# Altium PCB Active Sensor BB.PcbDoc
Units mil, origin at the board's own origin, x right, y up, seen from the top; angles counter-clockwise.
Board outline 3681 x 2951 mil, 4 copper layers (Top Layer, GND Plane, Signal Layer 1, Bottom Layer), stack 61.634 mil thick; 107 components, 97 nets, 358 pads, 97 vias.
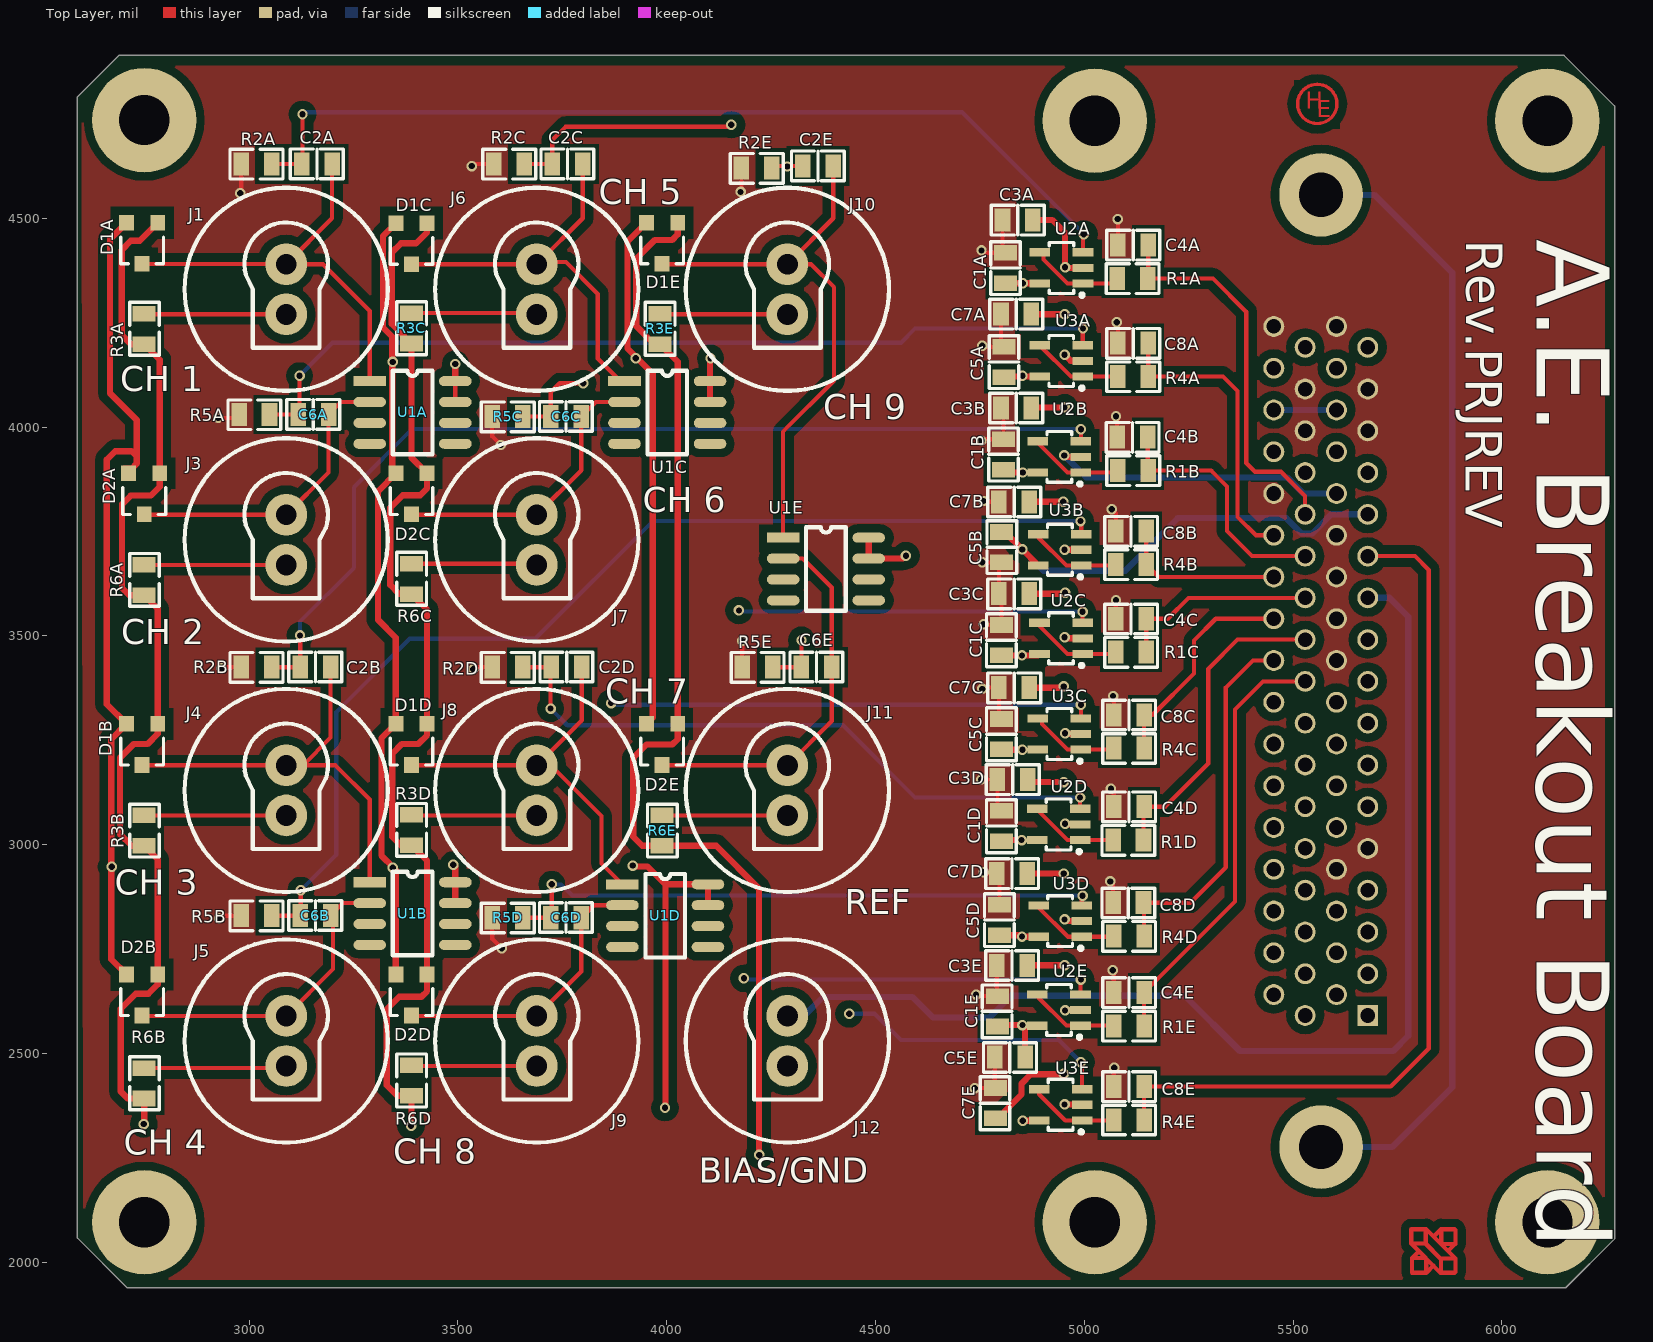
[diagram p0: Top Layer view]
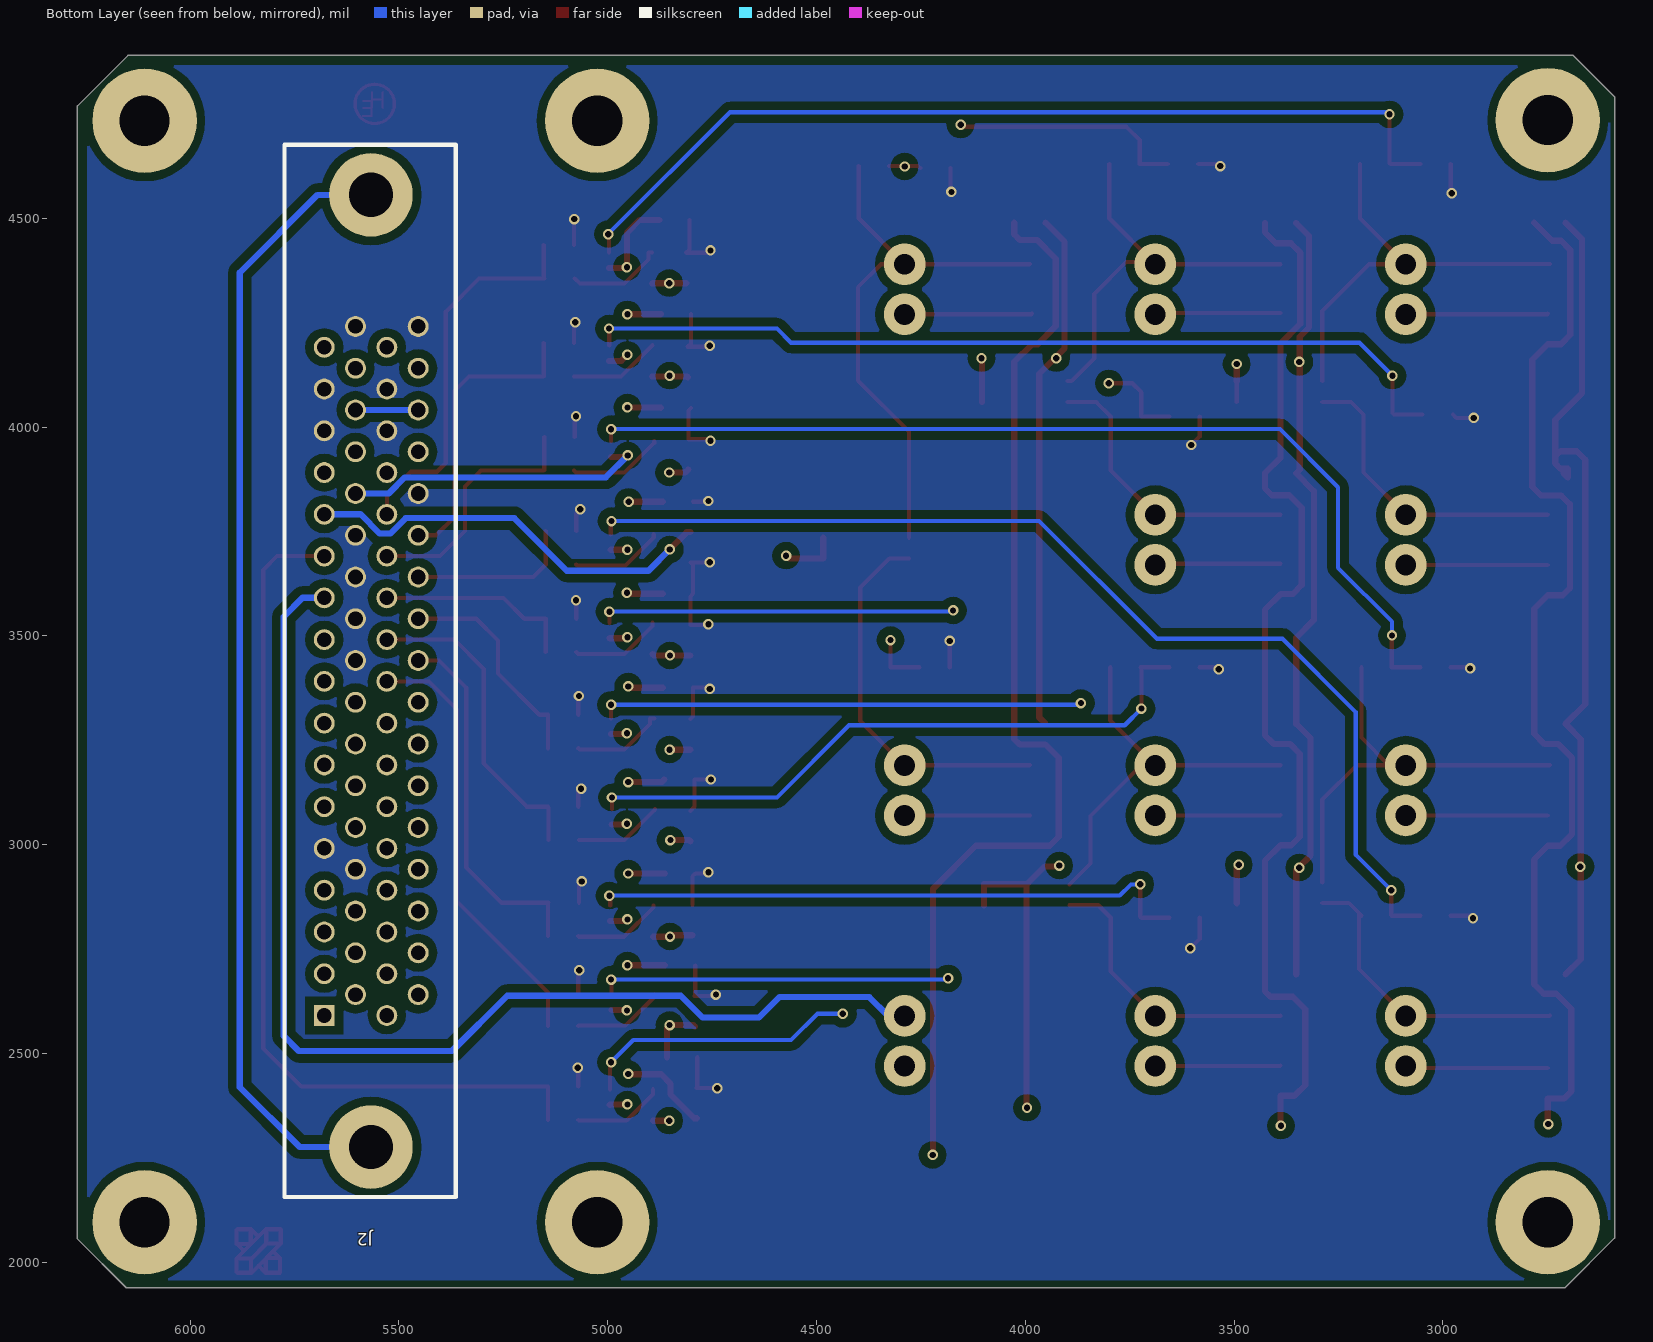
[diagram p1: Bottom Layer view, seen from below]
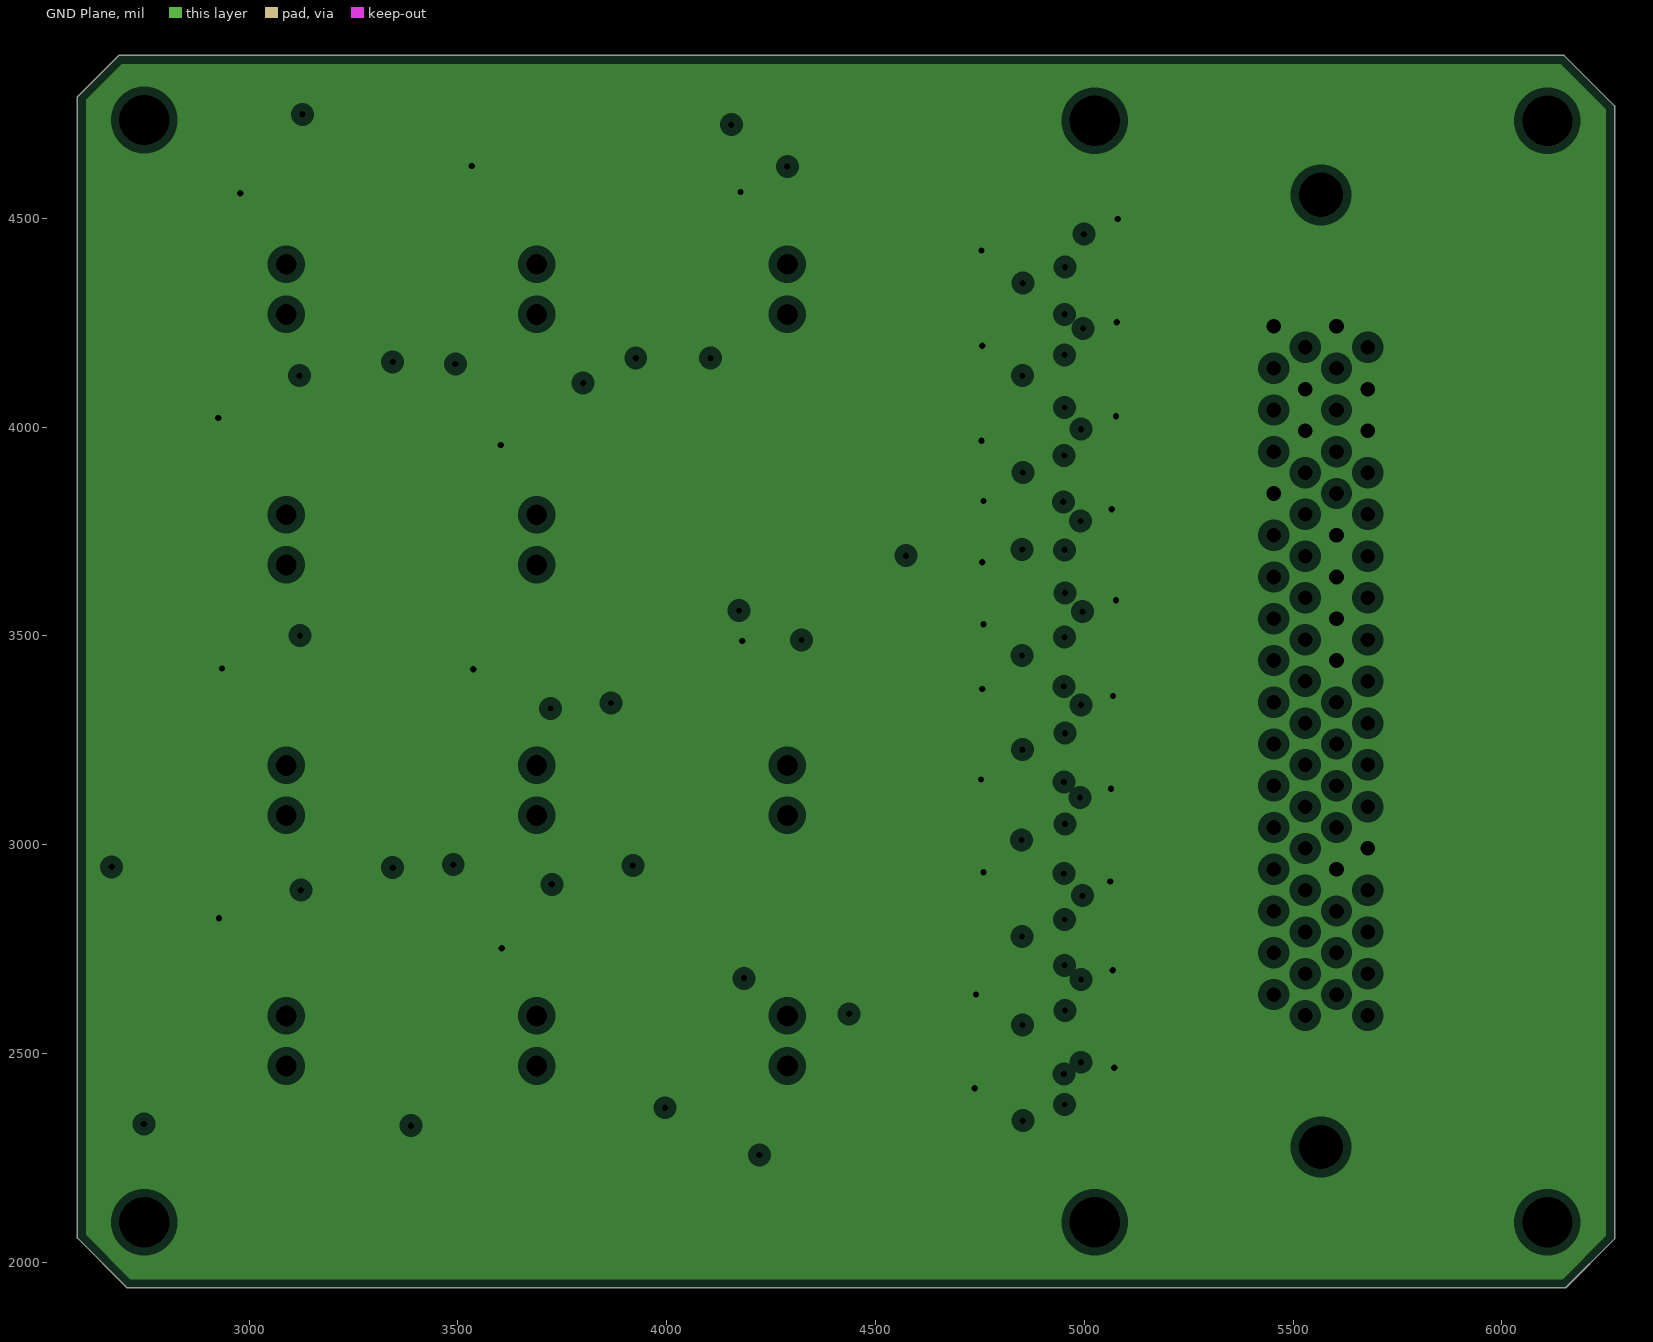
[diagram p2: GND Plane, clearances drawn from the general rule]
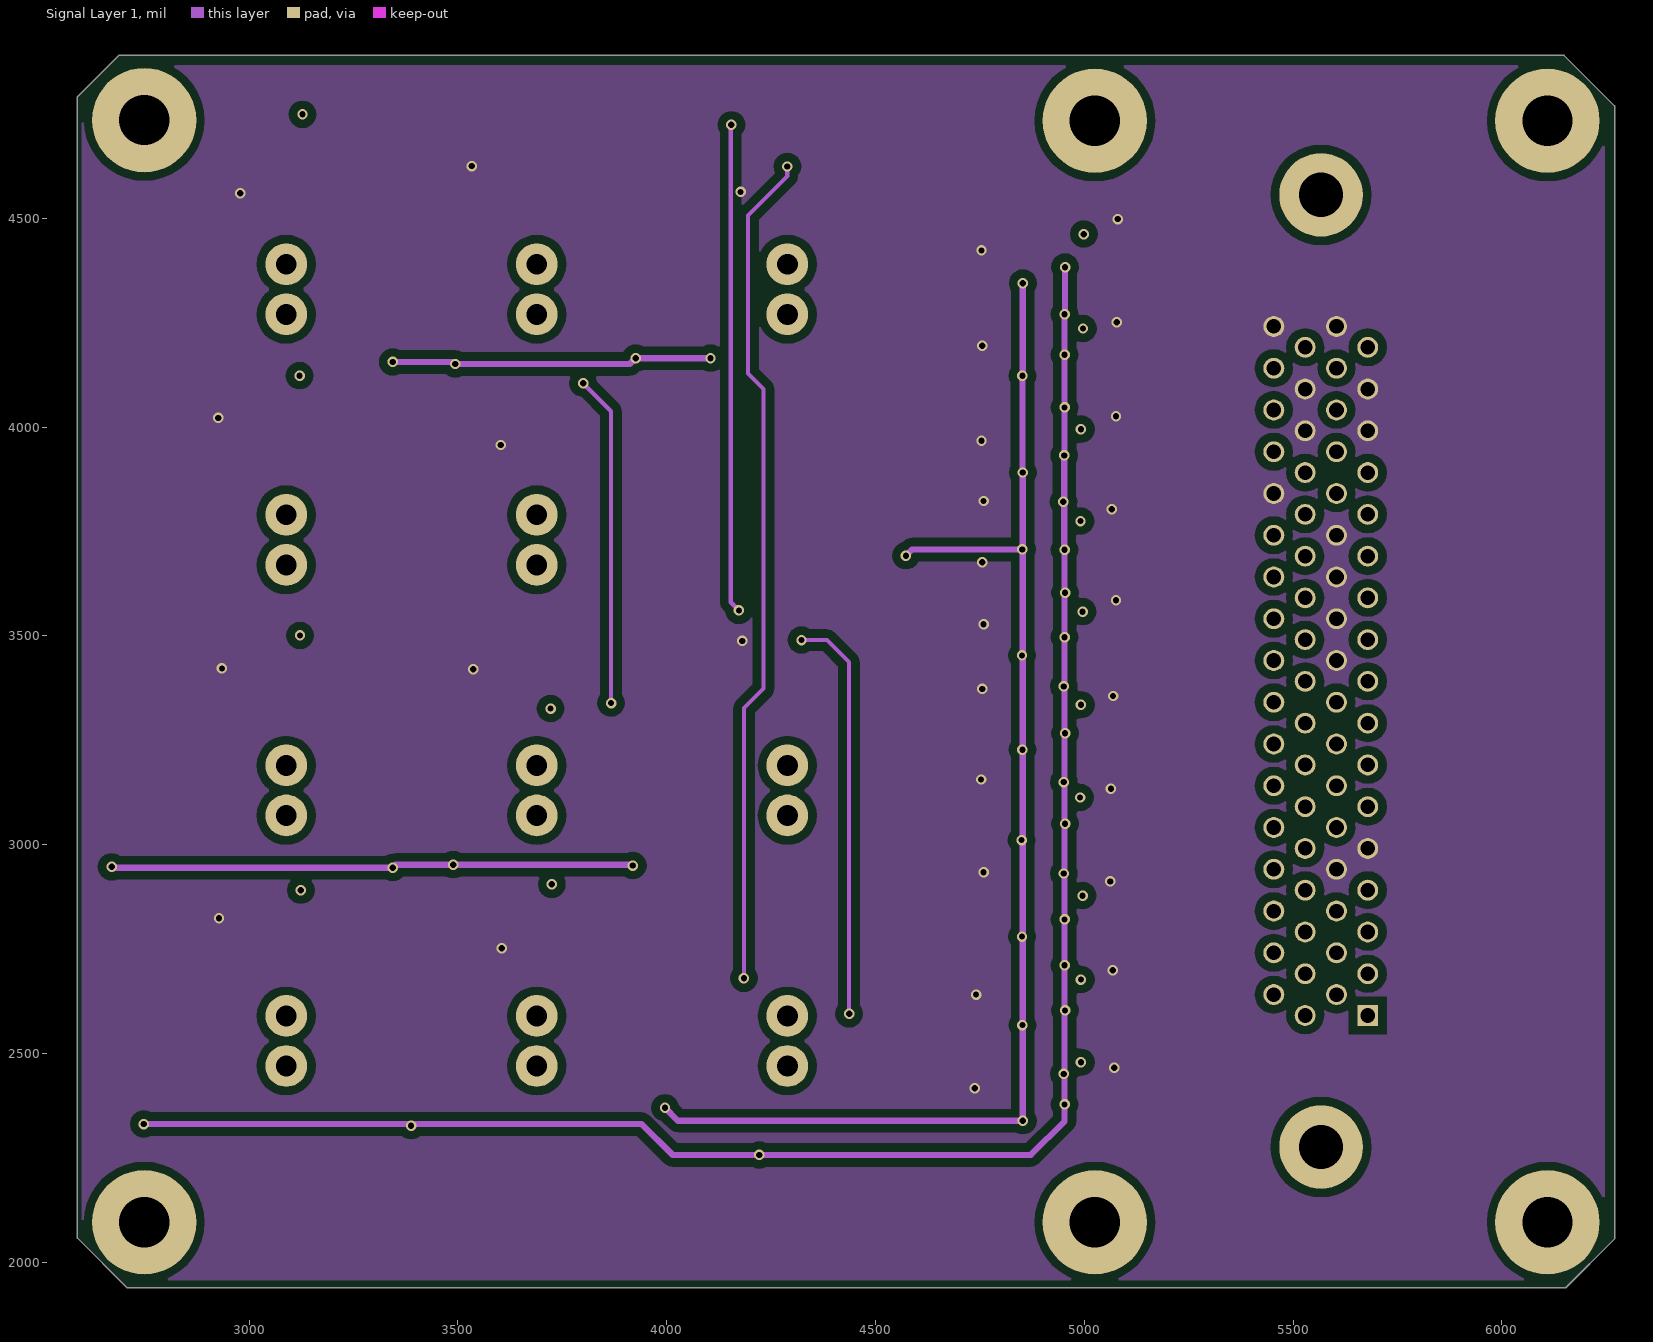
[diagram p3: Signal Layer 1]
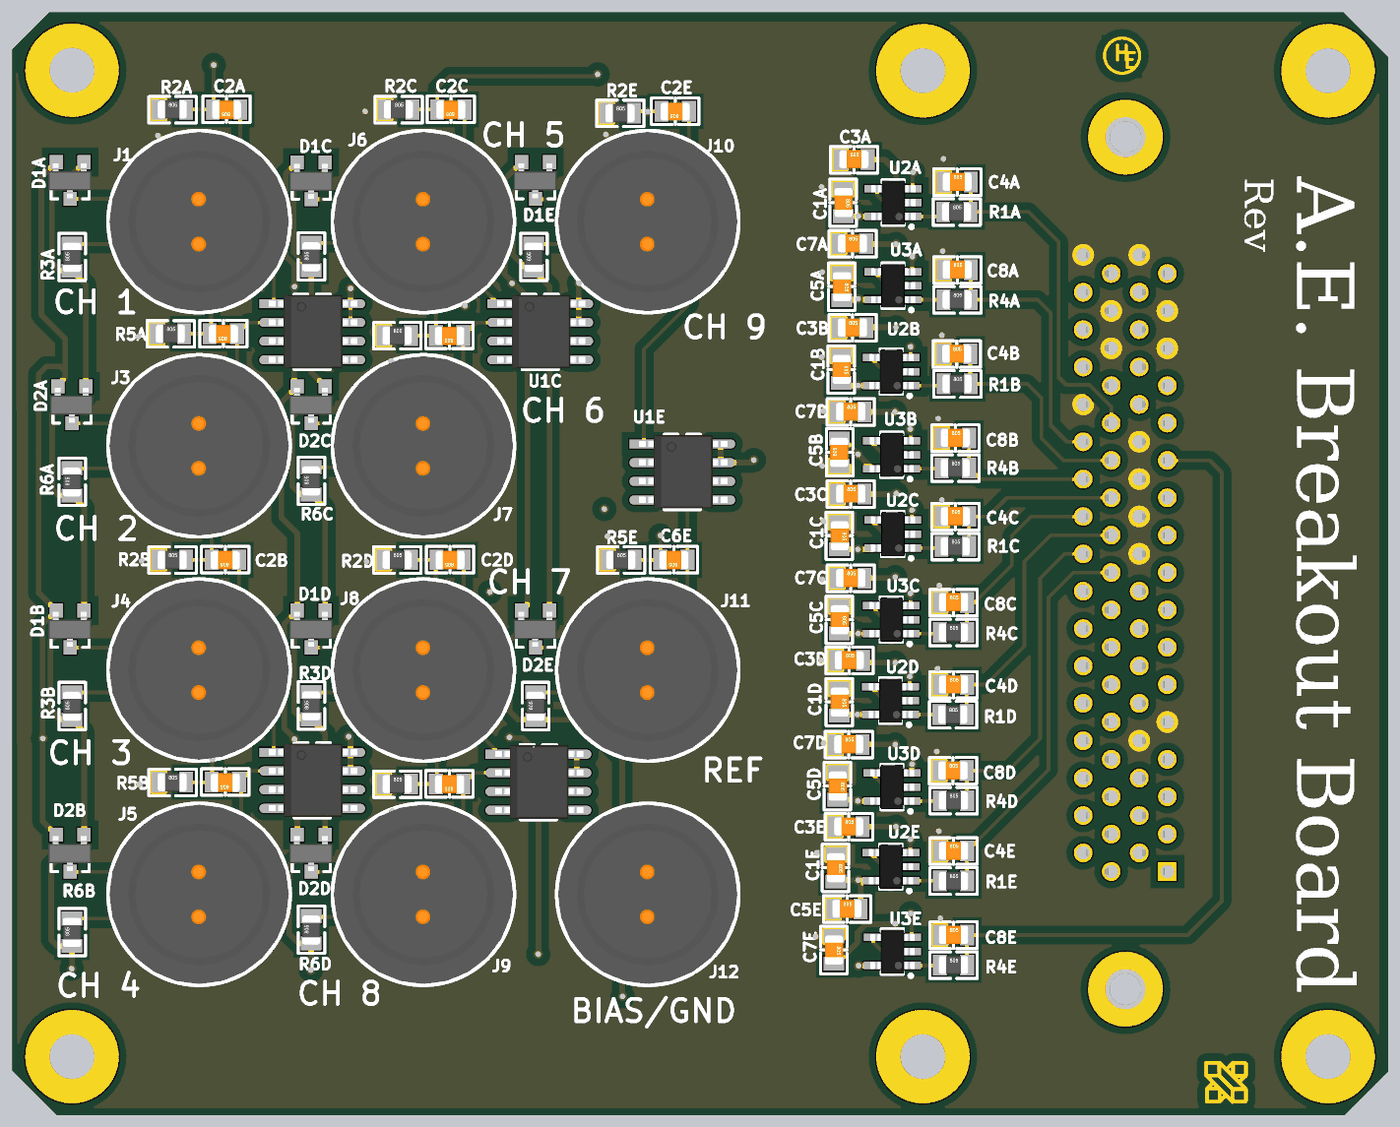
[diagram p4: 3D render of the assembled board from above, using the file's embedded part models]

## Layer stack, top to bottom
Top Solder: solder mask 0.4, Solder Resist, Dk 3.5
Top Layer: signal copper 1.4
Dielectric 1: core 10, FR-4, Dk 4.2
GND Plane: plane copper 1.417, net AGND
Dielectric 3: prepreg 36, Dk 4.2
Signal Layer 1: signal copper 1.417
Dielectric 2: core 10, Dk 4.2
Bottom Layer: signal copper 1.4
Bottom Solder: solder mask 0.4, Solder Resist, Dk 3.5

## Board outline
2589,2058 2589,4791 2688,4890 6149,4890 6270,4769 6270,2056 6153,1939 2708,1939

## Design rules (kind name [scope] priority, off if disabled: settings)
Clearance Clearance_1 [InNamedPolygon('BOT GND') Or  InNamedPolygon('TOP GND') Or  InNamedPolygon('SL1 GND')] p1: gap=20 ignorepadtopadclearanceinfootprint=FALSE
Clearance [All] p2: gap=6 ignorepadtopadclearanceinfootprint=FALSE
PlaneClearance [All] p1: clearance=20
PlaneConnect [All] p1: planeconnectstyle=Direct reliefexpansion=20 reliefentries=4 reliefconductorwidth=10 reliefairgap=10
PolygonConnect PolygonConnect_1 [All vs IsNamedPolygon('BOT GND') Or  IsNamedPolygon('TOP GND') Or  IsNamedPolygon('SL1 GND')] p1: connectstyle=Direct reliefconductorwidth=10 reliefentries=4 polygonreliefangle="90 Angle" airgapwidth=10
PolygonConnect [All] p2: connectstyle=Relief reliefconductorwidth=10 reliefentries=4 polygonreliefangle="90 Angle" airgapwidth=10
RoutingVias [All] p1: holewidth=15 width=25 viastyle="Through Hole" minholewidth=15 minwidth=25 maxholewidth=28 maxwidth=50
SolderMaskExpansion [All] p1: expansion=4
Width [All] p1: maxlimit=100 minlimit=6 preferedwidth=10
28 further rules are at their usual default settings.

## Classes and differential pairs
channel class "CC CHANNEL": CH1-2 CH3-4 CH5-6 CH7-8 CH9-REF
component class CH9-REF: C1E C2E C3E C4E C5E C6E C7E C8E D1E D2E R1E R2E R3E R4E R5E R6E U1E U2E U3E
component class CH7-8: C1D C2D C3D C4D C5D C6D C7D C8D D1D D2D R1D R2D R3D R4D R5D R6D U1D U2D U3D
component class CH5-6: C1C C2C C3C C4C C5C C6C C7C C8C D1C D2C R1C R2C R3C R4C R5C R6C U1C U2C U3C
component class CH3-4: C1B C2B C3B C4B C5B C6B C7B C8B D1B D2B R1B R2B R3B R4B R5B R6B U1B U2B U3B
component class CH1-2: C1A C2A C3A C4A C5A C6A C7A C8A D1A D2A R1A R2A R3A R4A R5A R6A U1A U2A U3A
component class "Active Sensor BB": J1 J2 J3 J4 J5 J6 J7 J8 J9 J10 J11 J12

## Components (designator, comment, footprint, x,y, rotation, side; value= is the part's Value field where it differs from the comment)
C1A "" 0805C 4812,4381 r270 top (schematic designator C1)
C1B "" 0805C 4807,3934.58 r270 top (schematic designator C1)
C1C "" 0805C 4802,3489.58 r270 top (schematic designator C1)
C1D "" 0805C 4802,3044.58 r270 top (schematic designator C1)
C1E "" 0805C 4792,2601 r270 top (schematic designator C1)
C2A "50V" 0805C 3162.58,4630 r180 top (schematic designator C2)
C2B "50V" 0805C 3159,3425 r180 top (schematic designator C2)
C2C "50V" 0805C 3762.58,4630 r180 top (schematic designator C2)
C2D "50V" 0805C 3760.42,3425 r180 top (schematic designator C2)
C2E "50V" 0805C 4362.58,4625 r180 top (schematic designator C2)
C3A "" 0805C 4840.58,4496 r0 top (schematic designator C3)
C3B "" 0805C 4837,4046 r0 top (schematic designator C3)
C3C "" 0805C 4832,3601 r0 top (schematic designator C3)
C3D "" 0805C 4828.42,3156 r0 top (schematic designator C3)
C3E "" 0805C 4827,2711 r0 top (schematic designator C3)
C4A "" 0805C 5117,4436 r0 top (schematic designator C4)
C4B "" 0805C 5115.58,3976 r0 top (schematic designator C4)
C4C "" 0805C 5112,3541 r0 top (schematic designator C4)
C4D "" 0805C 5107,3091 r0 top (schematic designator C4)
C4E "" 0805C 5107,2646 r0 top (schematic designator C4)
C5A "" 0805C 4808.42,4156 r270 top (schematic designator C5)
C5B "" 0805C 4802,3712.42 r90 top (schematic designator C5)
C5C "" 0805C 4802,3264.58 r270 top (schematic designator C5)
C5D "" 0805C 4797,2819.58 r270 top (schematic designator C5)
C5E "" 0805C 4822,2491 r0 top (schematic designator C5)
C6A "50V" 0805C 3154,4030 r180 top (schematic designator C6)
C6B "50V" 0805C 3159,2830 r180 top (schematic designator C6)
C6C "50V" 0805C 3759,4025 r180 top (schematic designator C6)
C6D "50V" 0805C 3759,2825 r180 top (schematic designator C6)
C6E "50V" 0805C 4359,3425 r180 top (schematic designator C6)
C7A "" 0805C 4837,4271 r0 top (schematic designator C7)
C7B "" 0805C 4832,3821 r0 top (schematic designator C7)
C7C "" 0805C 4832,3376 r0 top (schematic designator C7)
C7D "" 0805C 4827,2931 r0 top (schematic designator C7)
C7E "" 0805C 4787,2381 r270 top (schematic designator C7)
C8A "" 0805C 5117,4201 r0 top (schematic designator C8)
C8B "" 0805C 5112,3751 r0 top (schematic designator C8)
C8C "" 0805C 5107,3311 r0 top (schematic designator C8)
C8D "" 0805C 5105.58,2861 r0 top (schematic designator C8)
C8E "" 0805C 5107,2421 r0 top (schematic designator C8)
D1A "CMPD6001S TR" SOT-23 2744,4440 r180 top (schematic designator D1)
D1B "CMPD6001S TR" SOT-23 2744,3240 r180 top (schematic designator D1)
D1C "CMPD6001S TR" SOT-23 3389,4439.21 r180 top (schematic designator D1)
D1D "CMPD6001S TR" SOT-23 3389,3240 r180 top (schematic designator D1)
D1E "CMPD6001S TR" SOT-23 3989,4440 r180 top (schematic designator D1)
D2A "CMPD6001S TR" SOT-23 2749,3840 r180 top (schematic designator D2)
D2B "CMPD6001S TR" SOT-23 2744,2640 r180 top (schematic designator D2)
D2C "CMPD6001S TR" SOT-23 3389,3840 r180 top (schematic designator D2)
D2D "CMPD6001S TR" SOT-23 3389,2640 r180 top (schematic designator D2)
D2E "CMPD6001S TR" SOT-23 3989,3240 r180 top (schematic designator D2)
J1 "CH 1" 38255 3089,4390 r0 top
J2 "10268-6212PC" 2-5174339-5 5454,2641 r90 bottom
J3 "CH 2" 38255 3089,3790 r0 top
J4 "CH 3" 38255 3089,3190 r0 top
J5 "CH 4" 38255 3089,2590 r0 top
J6 "CH 5" 38255 3689,4390 r0 top
J7 "CH 6" 38255 3689,3790 r0 top
J8 "CH 7" 38255 3689,3190 r0 top
J9 "CH 8" 38255 3689,2590 r0 top
J10 "CH 9" 38255 4289,4390 r0 top
J11 "REF" 38255 4289,3190 r0 top
J12 "BIAS/GND" 38255 4289,2590 r0 top
R1A "Res 0805" 0805R 5115.58,4356 r0 top (schematic designator R1)
R1B "Res 0805" 0805R 5117,3896 r0 top (schematic designator R1)
R1C "Res 0805" 0805R 5112,3461 r0 top (schematic designator R1)
R1D "Res 0805" 0805R 5105.58,3011 r0 top (schematic designator R1)
R1E "Res 0805" 0805R 5107,2566 r0 top (schematic designator R1)
R2A "Res 0805" 0805R 3017.58,4630 r0 top (schematic designator R2)
R2B "Res 0805" 0805R 3017.58,3425 r0 top (schematic designator R2)
R2C "Res 0805" 0805R 3622.58,4630 r0 top (schematic designator R2)
R2D "Res 0805" 0805R 3619,3425 r0 top (schematic designator R2)
R2E "Res 0805" 0805R 4215.42,4620 r0 top (schematic designator R2)
R3A "Res 0805" 0805R 2749,4235 r90 top (schematic designator R3)
R3B "Res 0805" 0805R 2749,3033.58 r90 top (schematic designator R3)
R3C "Res 0805" 0805R 3389,4236.42 r90 top (schematic designator R3)
R3D "Res 0805" 0805R 3389,3035 r90 top (schematic designator R3)
R3E "Res 0805" 0805R 3984,4235 r90 top (schematic designator R3)
R4A "Res 0805" 0805R 5117,4121 r0 top (schematic designator R4)
R4B "Res 0805" 0805R 5112,3671 r0 top (schematic designator R4)
R4C "Res 0805" 0805R 5107,3231 r0 top (schematic designator R4)
R4D "Res 0805" 0805R 5107,2781 r0 top (schematic designator R4)
R4E "Res 0805" 0805R 5107,2341 r0 top (schematic designator R4)
R5A "Res 0805" 0805R 3012.58,4030 r0 top (schematic designator R5)
R5B "Res 0805" 0805R 3017.58,2830 r0 top (schematic designator R5)
R5C "Res 0805" 0805R 3619,4025 r0 top (schematic designator R5)
R5D "Res 0805" 0805R 3619,2825 r0 top (schematic designator R5)
R5E "Res 0805" 0805R 4217.58,3425 r0 top (schematic designator R5)
R6A "Res 0805" 0805R 2749,3633.58 r90 top (schematic designator R6)
R6B "Res 0805" 0805R 2749,2428.58 r90 top (schematic designator R6)
R6C "Res 0805" 0805R 3389,3636.42 r90 top (schematic designator R6)
R6D "Res 0805" 0805R 3389,2435 r90 top (schematic designator R6)
R6E "Res 0805" 0805R 3989,3033.58 r90 top (schematic designator R6)
U1A "REF200AU/2K5" SOIC-8 3289,4110 r0 top (schematic designator U1)
U1B "REF200AU/2K5" SOIC-8 3289,2910 r0 top (schematic designator U1)
U1C "REF200AU/2K5" SOIC-8 3899,4110 r0 top (schematic designator U1)
U1D "REF200AU/2K5" SOIC-8 3894,2905 r0 top (schematic designator U1)
U1E "REF200AU/2K5" SOIC-8 4279,3735 r0 top (schematic designator U1)
U2A "LPV821DBVR" SOT-23-5 4974.95,4319.98 r90 top (schematic designator U2)
U2B "LPV821DBVR" SOT-23-5 4969.95,3867.57 r90 top (schematic designator U2)
U2C "LPV821DBVR" SOT-23-5 4973.95,3432.98 r90 top (schematic designator U2)
U2D "LPV821DBVR" SOT-23-5 4968.1,2987.38 r90 top (schematic designator U2)
U2E "LPV821DBVR" SOT-23-5 4968.95,2542.98 r90 top (schematic designator U2)
U3A "LPV821DBVR" SOT-23-5 4974.52,4097.38 r90 top (schematic designator U3)
U3B "LPV821DBVR" SOT-23-5 4970.95,3644.98 r90 top (schematic designator U3)
U3C "LPV821DBVR" SOT-23-5 4969.95,3203.98 r90 top (schematic designator U3)
U3D "LPV821DBVR" SOT-23-5 4971.95,2755.98 r90 top (schematic designator U3)
U3E "LPV821DBVR" SOT-23-5 4972.95,2315.98 r90 top (schematic designator U3)

## Footprints (in the part's own frame and the unit in brackets; to place one, negate y for a bottom-side part, rotate by r counter-clockwise, add the part's x,y. Pads: shape width x height; smd on the part's side, far side on the other; paste and mask are expansions set on the pad)
2-5174339-5 [mil]
  rect 50x50 hole 35: 1(-50,225)
  round 50 hole 35: 2(0,150) 3(50,225) 4(100,150) 5(150,225) 6(200,150) 7(250,225) 8(300,150) 9(350,225) 10(400,150) 11(450,225) 12(500,150) 13(550,225) 14(600,150) 15(650,225) 16(700,150) 17(750,225) 18(800,150) 19(850,225) 20(900,150) 21(950,225) 22(1000,150) 23(1050,225) 24(1100,150) 25(1150,225) 26(1200,150) 27(1250,225) 28(1300,150) 29(1350,225) 30(1400,150) 31(1450,225) 32(1500,150) 33(1550,225) 34(1600,150) 35(-50,75) 36(0,0) 37(50,75) 38(100,0) 39(150,75) 40(200,0) 41(250,75) 42(300,0) 43(350,75) 44(400,0) 45(450,75) 46(500,0) 47(550,75) 48(600,0) 49(650,75) 50(700,0) 51(750,75) 52(800,0) 53(850,75) 54(900,0) 55(950,75) 56(1000,0) 57(1050,75) 58(1100,0) 59(1150,75) 60(1200,0) 61(1250,75) 62(1300,0) 63(1350,75) 64(1400,0) 65(1450,75) 66(1500,0) 67(1550,75) 68(1600,0)
  round 200 hole 106.3: SH(-365,113) SH(1915,113)
  silkscreen extent -485,-90 2035,320, body extent -483,-90 2033,316, height 367
0805C [mm]
  rect 0.95x1.4 smd: 1(-0.925,0) 2(0.925,0)
  silkscreen extent -1.6,-0.91 1.62,0.89, body extent -1,-0.61 1,0.64, height 0.8
0805R [mm] "Chip Resistor, Body 2.0x1.3mm, IPC Low Density"
  rect 0.95x1.4 smd: 1(-0.925,0) 2(0.925,0)
  silkscreen extent -1.6,-0.91 1.62,0.89, body extent -1.01,-0.62 0.99,0.63, height 0.8
38255 [mil]
  round 100 hole 50: 1(0,0) 2(0,-120)
  silkscreen extent -243,-303 243,183, body extent -240,-300 240,180, height 500
SOIC-8 [mil]
  rect 78x24 smd: 1(0,0)
  oval 78x24 smd: 2(0,-50) 3(0,-100) 4(0,-150) 5(205,-150) 6(205,-100) 7(205,-50) 8(205,0)
  silkscreen extent 55,-175 150,25, body extent -13,-173 223,24, height 69
SOT-23 [mm] "SOT-23; 3 Leads; Body 3.0 x 2.6 mm, inc. leads (LxW max)"
  rect 0.9x0.95 smd: 1(-0.95,-1.25) 2(0.95,-1.25) 3(0,1.25)
  silkscreen extent -1.3,-0.38 1.3,1.25, body extent -1.43,-1.16 1.47,1.21, height 0.97
SOT-23-5 [mm] "5-Lead Plastic SOT-23"
  rect 0.5x1.25 smd: 1(0.6,-0.56) 2(1.55,-0.56) 3(2.5,-0.56) 4(2.5,2.06) 5(0.6,2.06)
  silkscreen extent -0.2,-0.6 3.1,1.5, body extent 0.05,-0.76 3.05,2.24, height 1.32

## Part data
C1A C1B C1C C1D C1E C3A C3B C3C C3D C3E C5A C5B C5C C5D C5E C7A C7B C7C C7D C7E: library part Cap, "CAP .1UF 50V CERAMIC Y5V 0805", Capacitance=0.1µF, Manufacturer="AVX Corporation", Manufacturer Part Number=08055C104KAT2A, Operating Temperature="-55°C ~ 125°C", Package / Case="0805 (2012 Metric)", Ratings=-, Supplier Part Number 1=478-1395-1-ND, Temperature Coefficient=X7R, Tolerance=±10%, Voltage - Rated=50V, Applications="General Purpose", Category=Capacitors, ComponentLink1Description=http://datasheets.avx.com/X7RDielectric.pdf, ComponentLink1URL=http://datasheets.avx.com/X7RDielectric.pdf, Description1="CAP CER 0.1UF 50V X7R 0805", Features=-, Height - Seated (Max)=-, Lead Spacing=-, Lead Style=-, Mounting Type="Surface Mount, MLCC", Packaging="Cut Tape (CT)", Part Status=Active, Pricing 1="1=0.1, 10=0.036, 25=0.0264, 50=0.0198, 100=0.0162, 250=0.01352, 500=0.01156, 1000=0.00908 (USD)", Revision="July-2002: Re-released for DXP Platform.", RoHS="RoHS Compliant", Size / Dimension="0.079\" L x 0.049\" W (2.01mm x 1.25mm)", Stock 1=5022563, Supplier 1=Digi-Key, Thickness (Max)="0.037\" (0.94mm)"
C2A C2B C2C C2D C2E C6A C6B C6C C6D C6E: library part Cap, "CAP .1UF 50V CERAMIC Y5V 0805", Capacitance=2.2uF, Manufacturer=Yageo, Manufacturer Part Number=CC0805MRX5R6BB225, Operating Temperature="-55°C ~ 85°C", Package / Case="0805 (2012 Metric)", Ratings=-, Supplier Part Number 1=311-3438-1-ND, Temperature Coefficient=X5R, Tolerance=±20%, Voltage - Rated=10V, Applications="General Purpose", Category=Capacitors, ComponentLink1Description=http://www.yageo.com/documents/recent/UPY-GPHC_X5R_4V-to-50V_25.pdf, ComponentLink1URL=http://www.yageo.com/documents/recent/UPY-GPHC_X5R_4V-to-50V_25.pdf, Description1="CAP CER 2.2UF 10V X5R 0805", Failure Rate=-, Features=-, Height - Seated (Max)=-, Lead Spacing=-, Lead Style=-, Mounting Type="Surface Mount, MLCC", Notification="Current market demand for these product types have resulted in fluctuating and extending lead times. Lead times may differ.", Packaging="Cut Tape (CT)", Part Status=Active, Pricing 1="1=0.24, 10=0.161, 100=0.0818, 500=0.05598, 1000=0.04951 (USD)", Revision="July-2002: Re-released for DXP Platform.", RoHS="RoHS Compliant", Size / Dimension="0.079\" L x 0.049\" W (2.00mm x 1.25mm)", Stock 1=31890, Supplier 1=Digi-Key, Thickness (Max)="0.037\" (0.95mm)"
C4A C4B C4C C4D C4E C8A C8B C8C C8D C8E: library part Cap, "CAP .1UF 50V CERAMIC Y5V 0805", Capacitance=3.3uF, Manufacturer="TDK Corporation", Manufacturer Part Number=CGA4J3X7R1C335K125AB, Operating Temperature="-55°C ~ 125°C", Package / Case="0805 (2012 Metric)", Ratings=AEC-Q200, Supplier Part Number 1=445-12736-1-ND, Temperature Coefficient=X7R, Tolerance=±10%, Voltage - Rated=16V, Applications=Automotive, Category=Capacitors, ComponentLink1Description=https://product.tdk.com/info/en/catalog/datasheets/mlcc_automotive_general_en.pdf, ComponentLink1URL=https://product.tdk.com/info/en/catalog/datasheets/mlcc_automotive_general_en.pdf, Description1="CAP CER 3.3UF 16V X7R 0805", Failure Rate=-, Features=-, Height - Seated (Max)=-, Lead Spacing=-, Lead Style=-, Mounting Type="Surface Mount, MLCC", Packaging="Cut Tape (CT)", Part Status=Active, Pricing 1="1=0.55, 10=0.38, 100=0.2277, 500=0.17078, 1000=0.14421 (USD)", Revision="July-2002: Re-released for DXP Platform.", RoHS="RoHS Compliant", Size / Dimension="0.079\" L x 0.049\" W (2.00mm x 1.25mm)", Stock 1=20000, Supplier 1=Digi-Key, Thickness (Max)="0.057\" (1.45mm)"
D1A D1B D1C D1D D1E D2A D2B D2C D2D D2E: Current - Average Rectified (Io) (per Diode)=250mA, Current - Reverse Leakage @ Vr="500pA @ 75V", Manufacturer="Central Semiconductor Corp", Package / Case="TO-236-3, SC-59, SOT-23-3", Supplier Device Package=SOT-23, Supplier Part Number 1="CMPD6001S CT-ND", Voltage - DC Reverse (Vr) (Max)=75V, Voltage - Forward (Vf) (Max) @ If="1.1V @ 100mA", Category="Discrete Semiconductor Products", ComponentLink1Description=http://www.centralsemi.com/PDFs/products/CMPD6001-A-C-S_R1.PDF, ComponentLink1URL=http://www.centralsemi.com/PDFs/products/CMPD6001-A-C-S_R1.PDF, Description1="DIODE ARRAY GP 75V 250MA SOT23", Diode Configuration="1 Pair Series Connection", Diode Type=Standard, Manufacturer Part Number="CMPD6001S TR", Mounting Type="Surface Mount", Packaging="Cut Tape (CT)", Part Status=Active, Pricing 1="1=0.89, 10=0.872, 25=0.7868, 100=0.6885, 250=0.60376, 500=0.53548, 750=0.46717, 1000=0.42346 (USD)", Reverse Recovery Time (trr)=3µs, RoHS="RoHS Compliant", Speed="Fast Recovery =< 500ns, > 200mA (Io)", Stock 1=7051, Supplier 1=Digi-Key
J1 J3 J4 J5 J6 J7 J8 J9 J10 J11 J12: library part 38255, Manufacturer=PLASTICS1, Description1="TOUCHLESS CONNECTOR", Manufacturer Part Number=38255
J2: Color=Black, Current Rating=1A, Manufacturer="TE Connectivity", Manufacturer Part Number=2-5174339-5, Operating Temperature="-55°C ~ 85°C", Standard Package=420, Supplier Part Number 1=A121355-ND, Voltage Rating=100V, 3D Model=2-5174339-5.pdf, Category="Connectors, Interconnects", Connector Style=D-Type, Connector Type="Cap, Male Pins", Contact Finish=Gold, Contact Finish Thickness="30µin (0.76µm)", Contact Type=Signal, Description1="TE CONNECTIVITY / AMP         2-5174339-5             Standard D Sub Connector, Vertical, AMPLIMITE 0.050 Series, Plug, 68 Contacts, Steel Body", Family="D-Sub Connectors", Features=Shielded, Flange Feature="Housing/Shell (M2.5)", Housing Material="Polybutylene Terephthalate (PBT)", Mounting Type="Through Hole", Number of Positions=68, Number of Rows=2, Pricing 1="1=20.4, 10=18.414, 25=17.6424, 50=16.5398, 100=15.9885, 250=15.1064, 500=14.6653 (USD)", RoHS Information="2-5174339-5 Statement of Compliance", Series="AMPLIMITE .050 II", Shell Material, Finish="Zinc, Nickel Plated", Shell Size, Connector Layout="0.050 Pitch x 0.100 Row to Row", Stock 1=1867, Supplier 1=Digi-Key, Termination=Solder
R1A R1B R1C R1D R1E R4A R4B R4C R4D R4E: "Resistor", Manufacturer=Yageo, Manufacturer Part Number=RC0805FR-071K18L, Operating Temperature="-55°C ~ 155°C", Package / Case="0805 (2012 Metric)", Power (Watts)="0.125W, 1/8W", Resistance (Ohms)=1.18K, Supplier Device Package=0805, Supplier Part Number 1=311-1.18KCRCT-ND, Temperature Coefficient=±100ppm/°C, Tolerance=±1%, Category=Resistors, ComponentLink1Description=http://www.yageo.com/documents/recent/PYu-RC_Group_51_RoHS_L_9.pdf, ComponentLink1URL=http://www.yageo.com/documents/recent/PYu-RC_Group_51_RoHS_L_9.pdf, Composition="Thick Film", Description1="RES SMD 1.18K OHM 1% 1/8W 0805", Failure Rate=-, Features="Moisture Resistant", Height - Seated (Max)="0.024\" (0.60mm)", Packaging="Cut Tape (CT)", Part Status=Active, Pricing 1="1=0.1, 10=0.042, 100=0.0169, 1000=0.00759, 2500=0.00659 (USD)", RoHS="RoHS Compliant", Size / Dimension="0.079\" L x 0.049\" W (2.00mm x 1.25mm)", Stock 1=178716, Supplier 1=Digi-Key
R2A R2B R2C R2D R2E R5A R5B R5C R5D R5E: "Resistor", Manufacturer="Panasonic Electronic Components", Manufacturer Part Number=ERJ-6ENF6803V, Operating Temperature="-55°C ~ 155°C", Package / Case="0805 (2012 Metric)", Power (Watts)="0.125W, 1/8W", Resistance (Ohms)=680K, Supplier Device Package=0805, Supplier Part Number 1=P680KCCT-ND, Temperature Coefficient=±100ppm/°C, Tolerance=±1%, Category=Resistors, ComponentLink1Description=https://industrial.panasonic.com/cdbs/www-data/pdf/RDA0000/AOA0000C304.pdf, ComponentLink1URL=https://industrial.panasonic.com/cdbs/www-data/pdf/RDA0000/AOA0000C304.pdf, Composition="Thick Film", Description1="RES SMD 680K OHM 1% 1/8W 0805", Failure Rate=-, Features="Automotive AEC-Q200", Height - Seated (Max)="0.028\" (0.70mm)", Packaging="Cut Tape (CT)", Part Status=Active, Pricing 1="1=0.1, 10=0.079, 100=0.0305, 1000=0.0134, 2500=0.01157 (USD)", RoHS="RoHS Compliant", Size / Dimension="0.079\" L x 0.049\" W (2.00mm x 1.25mm)", Stock 1=73875, Supplier 1=Digi-Key
R3A R3B R3C R3D R3E R6A R6B R6C R6D R6E: "Resistor", Manufacturer="Panasonic Electronic Components", Manufacturer Part Number=ERJ-6GEY0R00V, Operating Temperature="-55°C ~ 155°C", Package / Case="0805 (2012 Metric)", Power (Watts)="0.125W, 1/8W", Resistance (Ohms)=0R, Supplier Device Package=0805, Supplier Part Number 1=P0.0ACT-ND, Temperature Coefficient=-, Tolerance=Jumper, Category=Resistors, ComponentLink1Description=http://industrial.panasonic.com/www-cgi/jvcr13pz.cgi?E+PZ+3+AOA0001+ERJ6GEY0R00V+7+WW, ComponentLink1URL=http://industrial.panasonic.com/www-cgi/jvcr13pz.cgi?E+PZ+3+AOA0001+ERJ6GEY0R00V+7+WW, Composition="Thick Film", Description1="RES SMD 0.0 OHM JUMPER 1/8W 0805", Features="Automotive AEC-Q200", Height="0.028\" (0.70mm)", Number of Terminations=2, Packaging="Cut Tape (CT)", Part Status=Active, Pricing 1="1=0.1, 50=0.0196, 100=0.0149, 250=0.01104, 500=0.00816, 1000=0.00544, 2500=0.00459 (USD)", RoHS="RoHS Compliant", Size / Dimension="0.079\" L x 0.049\" W (2.00mm x 1.25mm)", Stock 1=3456609, Supplier 1=Digi-Key
U1A U1B U1C U1D U1E: Base Part Number=REF200, Current - Output=100µA, Manufacturer="Texas Instruments", Operating Temperature="-25°C ~ 85°C", Package / Case="8-SOIC (0.154\", 3.90mm Width)", Supplier Device Package=8-SOIC, Supplier Part Number 1=296-27726-1-ND, Voltage - Input="2.5 V ~ 40 V", Accuracy=±0.25%, Category="Integrated Circuits (ICs)", ComponentLink1Description=http://www.ti.com/lit/ds/symlink/ref200.pdf, ComponentLink1URL=http://www.ti.com/lit/ds/symlink/ref200.pdf, Description1="IC CURR SOURCE/SINK MIRROR 8SOIC", Function="Current Mirror, Current Sink/Source", Manufacturer Part Number=REF200AU/2K5, Mounting Type="Surface Mount", Packaging="Cut Tape (CT)", Part Status=Active, Pricing 1="1=7.65, 10=6.909, 100=5.7202, 500=4.98108, 1000=4.33836 (USD)", RoHS="RoHS Compliant", Sensing Method=-, Stock 1=10238, Supplier 1=Digi-Key
U2A U2B U2C U2D U2E U3A U3B U3C U3D U3E: Dual Supply Voltage (Max)=±2.75V, Dual Supply Voltage (Min)=±0.9V, Input Bias Current=200pA, Input Offset Voltage=10uV, Manufacturer="Texas Instruments", Manufacturer Part Number=OPA333AIDBVR, Operating Temperature Classification=Automotive, Operating Temp Range="-40C to 125C", Package Type=SOT-23, Power Supply Rejection Ratio=120dB, Power Supply Requirement=Single/Dual, Single Supply Voltage (Max)=5.5V, Single Supply Voltage (Min)=1.8V, Single Supply Voltage (Typ)=3/5V, Supplier Part Number 1=296-26269-1-ND, Voltage Gain in dB=130dB, Common Mode Rejection Ratio=106dB, Description1="IC OPAMP CHOPPER 350KHZ SOT23-5", Mounting="Surface Mount", Number of  Elements=1, Packaging="Tape and Reel", Pin Count=5, Pricing 1="1=2.54, 10=2.282, 100=1.8341, 500=1.5069, 1000=1.2486 (USD)", Rail/Rail I/O Type="Rail to Rail Input/Output", Shut Down Feature=No, Slew Rate=0.16V/us, Stock 1=10811, Supplier 1=Digi-Key, Technology=CMOS, Type="General Purpose Amplifier", Unity Gain Bandwidth Product=0.35MHz

## Free pads (board coordinates)
  round 250 hole 120: M(2749,2095.73) M(2749,4735) M(5025.26,2095.73) M(5025.26,4733.53) M(6108.92,2095.73) M(6108.92,4733.53)

## Via types
v1: diameter 25, hole 15, Top Layer to Bottom Layer, tented both sides, 97 vias

## Nets (pads, with @x,y where several pads share a name; then routed paths per layer and width w, separated by ;. In a path a pad name is that pad's centre, name@x,y a point inside that pad or via, vN(x,y) a via of type N, cw(c..) or ccw(c..) an arc to the next point about the centre after c; other vN are vias at no path point)
+2.5V: C1A.2 C1B.2 C1C.2 C1D.2 C1E.2 C5A.2 C5B.2 C5C.2 C5D.2 C5E.2 D1A.2 D1B.2 D1C.2 D1D.2 D1E.2 D2A.2 D2B.2 D2C.2 D2D.2 D2E.2 J2.25 U1A.7 U1A.8 U1B.7 U1B.8 U1C.7 U1C.8 U1D.7 U1D.8 U1E.7 U1E.8 U2A.5 U2B.5 U2C.5 U2D.5 U2E.5 U3A.5 U3B.5 U3C.5 U3D.5 U3E.5 | length 13337.5
  Top Layer w10: U1A.7 U1A.8
  Top Layer w15: D2B.2 2670,2725.81 2670,3252.61 D1B.2 2659.38,3336.43 2659.38,3922.2 2679.59,3942.41 2718.7,3942.41 2731,3930.11 ; D1A.2 2667,4449.61 2667,4081 2731,4017 2731,3930.11 ; v1@3345,2946 3317,2974 3317,3254.61 D1D.2 3351.6,3495.4 3309,3538 3309,3846.61 D2C.2 3343,3897.81 3343,4216.3 3321,4238.3 3321,4457.83 D1C.2 ; D2D.2 v1@3351.6,2939.4 ; v1(3489,2952) 3494,2947 U1B.8 U1B.7 ; U1A.8 v1(3494,4151) ; v1@3919,2948 3954,2948 3997,2905 ; D2E.2 3967,3304.61 3967,4128 3906,4189 3906,4443.61 D1E.2 ; v1(3996,2370) 3997,2371 3997,2905 ; U1D.7 U1D.8 3997,2905 ; U1C.7 U1C.8 4104,4164 v1(4105,4165) ; U1E.8 U1E.7 4566,3685 v1(4573,3692) ; C1E.2 4795.42,2568 v1(4852,2568) 4858.42,2561.58 C5E.2 ; C5D.2 4847.83,2783.17 v1(4851,2780) 4851.4,2779.6 U3D.5 ; C1D.2 4804.83,3011 v1(4850,3011) ; C5C.2 4802.57,3227.6 v1(4852,3227.6) ; C1C.2 v1(4851,3453.17) 4889.42,3453.17 U2C.5 ; C5B.2 4811,3748.83 4811,3747.45 v1(4851.45,3707) U3B.5 ; C1B.2 4813.97,3891.2 v1(4853,3891.2) ; C5A.2 4809.83,4121 U3A.5 ; C1A.2 v1(4853,4344.58) 4892.87,4344.58 U2A.5 ; v1(4853,2339) 4891.25,2339 U3E.5 ; D2A.2@2711.6,3900.41 D2A.2 2701.38,3879 2701.38,3900.41 D2A.2@2711.6,3900.41 ; D2A.2@2711.6,3900.41 2718.7,3900.41 2731,3912.71 2731,3930.11
  Signal Layer 1 w15: v1(2671,2947) 2673,2945 v1(3344,2945) 3351,2952 v1(3489,2952) 3917,2952 v1(3919,2950) ; v1(3344,4156) 3489,4156 v1(3494,4151) 3912,4151 v1(3926,4165) v1(4105,4165) ; v1(3996,2370) 4027,2339 v1(4853,2339) v1(4853,3891.2) ; v1(4573,3692) 4588,3707 v1(4851.45,3707) ; v1@4852,3891.2 v1(4852,4123) 4853,4124 v1(4853,4344.58)
  Bottom Layer w15: v1(4851.45,3707) 4902.45,3656 5098,3656 5224,3782 5483.55,3782 5520.55,3745 5546,3745 5592,3791 J2.25
+3.3V: J2.27
+VSYS: J2.28
-2.5V: C3A.2 C3B.2 C3C.2 C3D.2 C3E.2 C7A.2 C7B.2 C7C.2 C7D.2 C7E.2 D1A.1 D1B.1 D1C.1 D1D.1 D1E.1 D2A.1 D2B.1 D2C.1 D2D.1 D2E.1 J2.26 R3A.1 R3B.1 R3C.1 R3D.1 R3E.1 R6A.1 R6B.1 R6C.1 R6D.1 R6E.1 U2A.2 U2B.2 U2C.2 U2D.2 U2E.2 U3A.2 U3B.2 U3C.2 U3D.2 U3E.2 | length 14337.6
  Top Layer w15: v1(2748,2331) 2749,2332 R6B.1 2709.83,2392.17 2693,2409 2693,2607 2729,2643 2759,2643 2781.4,2665.4 D2B.1 2781.4,2964.76 R3B.1 2718.83,2997.17 2691,3025 2691,3208 2724,3241 2757,3241 2781.4,3265.4 D1B.1 2781.4,3564.76 R6A.1 2712.83,3597.17 2696,3614 2696,3815 2717,3836 2765,3836 2786.4,3857.4 D2A.1 2786.4,4161.18 R3A.1 2717.42,4198.58 2695,4221 2695,4424 2717,4446 2738.19,4446 D1A.1 ; v1(3388,2327) 3389,2328 R6D.1 3355.42,2398.58 3330,2424 3330,2606 3360,2636 3413,2636 3426.4,2649.4 D2D.1 3426.4,2961.18 R3D.1 3363.42,2998.58 3343,3019 3343,3218 3366,3241 3405,3241 3426.4,3262.4 D1D.1 3426.4,3562.6 R6C.1 3360,3600 3338,3622 3338,3807 3368,3837 3410,3837 3426.4,3853.4 D2C.1 3389,3926.61 R3C.1 3342,4247 3342,4418 3364,4440 3400,4440 3426.4,4466.4 D1C.1 ; D1E.1 4026.4,4461.4 4013,4448 3972,4448 3927,4403 3927,4242 3970.42,4198.58 R3E.1 4026.4,4156.18 D2E.1 4026.4,3252.4 4014,3240 3952,3240 3920,3208 3920,3019 3941.83,2997.17 R6E.1 4118.83,2997.17 4221,2895 4221,2258 v1(4222,2257) ; C7E.2 4792.58,2344.58 4850,2402 4850,2428 4871.94,2449.94 4949.94,2449.94 v1(4951,2451) ; C3E.2 v1(4953,2711) ; C7D.2 v1(4951,2931) ; C3D.2 4870.83,3150 v1(4951,3150) ; C7C.2 4948,3376 v1(4951,3379) ; C3C.2 4952,3601 v1(4954,3603) ; C7B.2 v1(4950,3821) ; C3B.2 4874.42,4047 v1(4953,4047) ; C7A.2 4874.42,4270 v1(4953,4270) ; C3A.2 4923,4496 4954,4465 v1(4954,4383) 4956,4381 U2A.2 ; v1(4952,3932) 4955.4,3928.6 U2B.2 ; v1(4953,2378) 4994,2378 U3E.2 ; v1(4953,2821) 4957,2817 U3D.2 ; v1(4953,3497) 4956,3494 U2C.2 ; v1(4953,3706) U3B.2 ; v1(4953,4173) 4967.6,4158.4 U3A.2 ; v1(4954,2603) 4955,2604 U2E.2 ; v1(4954,3050) 4955.6,3048.4 U2D.2 ; v1(4954,3267) 4956,3265 U3C.2
  Signal Layer 1 w15: v1(2748,2331) 3940,2331 4014,2257 v1(4222,2257) 4872,2257 4953,2338 v1(4953,2378) v1(4953,2711) v1(4953,2821) v1(4953,3497) v1(4953,3706) 4952,3707 v1(4952,3932) ; v1@4953,3932 v1(4953,4047) v1(4953,4173) v1(4953,4270) 4954,4271 v1(4954,4383)
  Bottom Layer w15: v1(4952,3932) 5004.5,3879.5 5486.05,3879.5 5524.55,3841 J2.26
AGND: C1A.1 C1B.1 C1C.1 C1D.1 C1E.1 C3A.1 C3B.1 C3C.1 C3D.1 C3E.1 C4A.1 C4B.1 C4C.1 C4D.1 C4E.1 C5A.1 C5B.1 C5C.1 C5D.1 C5E.1 C7A.1 C7B.1 C7C.1 C7D.1 C7E.1 C8A.1 C8B.1 C8C.1 C8D.1 C8E.1 J2.8 J2.9 J2.18 J2.20 J2.22 J2.24 J2.29 J2.31 J2.34 J2.60 J2.63 J2.65 J2.68 R2A.1 R2B.1 R2C.1 R2D.1 R2E.1 R5A.1 R5B.1 R5C.1 R5D.1 R5E.1 | length 2410.4
  Top Layer w10: v1(2926,4022) 2968.17,4022 R5A.1 ; v1(2928,2824) 2934,2830 R5B.1 ; v1(2935,3422) 2938,3425 R2B.1 ; v1(2978.83,4560.17) 2981.17,4560.17 R2A.1 ; v1(3533,4625) 3538,4630 R2C.1 ; v1(3537,3420) 3542,3425 R2D.1 ; R5D.1 3582.58,2774.42 v1(3605,2752) ; R5C.1 3582.58,3977.42 v1(3603,3957) ; v1(4177,4563) 4179,4565 R2E.1 ; v1(4181,3488) 4181.17,3487.83 R5E.1 ; v1(4738,2417) 4738.42,2417.42 C7E.1 4785.58,2418.83 C5E.1 ; v1(4741,2641) 4744.58,2637.42 C1E.1 4790.58,2638.83 C3E.1 ; v1(4753,3156) C3D.1 4792,3091 C1D.1 ; v1(4754,3967) 4758,3971 C1B.1 4807,4039.58 C3B.1 ; v1(4754,4423) 4759.58,4417.42 C1A.1 4804.17,4425.25 C3A.1 ; v1(4756,3373) 4759,3376 C7C.1 4795.58,3307.42 C5C.1 ; v1(4756,3676) C5B.1 4795.58,3669.58 C3C.1 4802,3594.58 C1C.1 4761,3526 v1(4759,3528) ; v1(4756,4195) 4758.58,4192.42 C5A.1 4800.58,4200.25 C7A.1 ; v1(4759,2934) 4762,2931 C7D.1 4797,2924.58 C5D.1 ; v1(4759,3823) 4761,3821 C7B.1 ; v1(5062,2912) 5069.17,2904.83 C8D.1 ; v1(5064,3134) 5070.58,3127.42 C4D.1 ; v1(5066,3803) 5075.58,3793.42 C8B.1 ; v1(5068,2699) 5070.58,2696.42 C4E.1 ; v1(5069,3356) 5070.58,3354.42 C8C.1 ; C8E.1 5070.58,2464.58 v1(5072,2466) ; C4C.1 5075.58,3584.58 v1(5076,3585) ; v1(5076,4026) 5079.17,4022.83 C4B.1 ; v1(5078,4251) 5080.58,4248.42 C8A.1 ; v1(5080,4498) 5080.58,4497.42 C4A.1
AUX0: J2.32
AUX1: J2.66
AUX2: J2.61
AUX3: J2.62
BIAS: J2.21 J12.1 | length 2736.7
  Bottom Layer w15: J12.1 4329,2590 4374,2635 4589,2635 4638,2586 4773,2586 4825,2638 5241,2638 5373,2506 5740,2506 5776,2542 5776,3546 5731,3591 J2.21
CC_A+A: C2A.1 D1A.3 J1.1 U1A.1 | length 1092.7
  Top Layer w10: D1A.3 3055.79,4390.79 3089,4424 J1.1 ; C2A.1 3199,4500 J1.1 ; U1A.1 3289,4278 3177,4390 J1.1
CC_A+B: C2B.1 D1B.3 J4.1 U1B.1 | length 1039.8
  Top Layer w10: D1B.3 2744.79,3190 J4.1 J4.1@3129,3190 ; C2B.1 3195.42,3256.42 J4.1@3129,3190 ; U1B.1 3289,3108 3207,3190 J4.1@3129,3190
CC_A+C: C2C.1 D1C.3 J6.1 U1C.1 | length 999.4
  Top Layer w10: D1C.3 J6.1 J6.1@3694,4395 ; C2C.1 3799,4500 J6.1@3694,4395 ; U1C.1 3889,4110 3835,4164 3835,4319 3759,4395 J6.1@3694,4395
CC_A+D: C2D.1 D1D.3 J8.1 U1D.1 | length 969.8
  Top Layer w10: D1D.3 3389.79,3190 J8.1 ; C2D.1 3796.83,3297.83 J8.1 ; U1D.1 3844,2955 3844,3069 3723,3190 J8.1
CC_A+E: C2E.1 D1E.3 J10.1 U1E.1 | length 1366.2
  Top Layer w10: D1E.3 3989.79,4390 J10.1 ; U1E.1 4279,3989 4401,4111 4401,4335 4346,4390 J10.1 ; C2E.1 4399,4500 J10.1
CC_A-A: J1.2 R3A.2 | length 340.6
  Top Layer w10: R3A.2 2750.42,4270 J1.2
CC_A-B: J4.2 R3B.2 | length 340
  Top Layer w10: R3B.2 J4.2
CC_A-C: J6.2 R3C.2 | length 301.2
  Top Layer w10: R3C.2 3686.17,4272.83 J6.2
CC_A-D: J8.2 R3D.2 | length 300.6
  Top Layer w10: R3D.2 3390.42,3070 J8.2
CC_A-E: J10.2 R3E.2 | length 305.6
  Top Layer w10: R3E.2 3985.42,4270 J10.2
CC_B+A: C6A.1 D2A.3 J3.1 U1A.2 | length 733.3
  Top Layer w10: D2A.3 2749.79,3790 J3.1 3190.42,3891.42 C6A.1 3220.42,4060 U1A.2
CC_B+B: C6B.1 D2B.3 J5.1 U1B.2 | length 743.9
  Top Layer w10: D2B.3 2744.79,2590 J5.1 3201.42,2702.42 C6B.1@3201.42,2836 ; C6B.1 C6B.1@3201.42,2836 ; U1B.2 3225.42,2860 C6B.1@3201.42,2836
CC_B+C: C6C.1 D2C.3 J7.1 U1C.2 | length 697.5
  Top Layer w10: D2C.3 3389.79,3790 J7.1 3795.42,3896.42 C6C.1 3830.42,4060 U1C.2
CC_B+D: C6D.1 D2D.3 J9.1 U1D.2 | length 690.4
  Top Layer w10: D2D.3 3389.79,2590 J9.1 3795.42,2696.42 C6D.1 3825.42,2855 U1D.2
CC_B+E: C6E.1 D2E.3 J11.1 U1E.2 | length 915.2
  Top Layer w10: D2E.3 3989.79,3190 J11.1 4395.42,3296.42 C6E.1 4395.42,3615.58 4326,3685 U1E.2
CC_B-A: J3.2 R6A.2 | length 340
  Top Layer w10: R6A.2 J3.2
CC_B-B: J5.2 R6B.2 | length 342.1
  Top Layer w10: R6B.2 3084,2465 J5.2
CC_B-C: J7.2 R6C.2 | length 301.2
  Top Layer w10: R6C.2 3686.17,3672.83 J7.2
CC_B-D: J9.2 R6D.2 | length 300.6
  Top Layer w10: R6D.2 3390.42,2470 J9.2
CC_B-E: J11.2 R6E.2 | length 300
  Top Layer w10: R6E.2 J11.2
CH1: C4A.2 J2.59 R1A.2 | length 929.4
  Top Layer w10: C4A.2 5153.42,4357.42 R1A.2 5308,4356 5388,4276 5388,3914 5409,3893 5471,3893 5529,3835 J2.59
CH2: C8A.2 J2.58 R4A.2 | length 714.3
  Top Layer w10: C8A.2 R4A.2 5332,4121 5367,4086 5367,3785 5411,3741 J2.58
CH3: C4B.2 J2.57 R1B.2 | length 603.8
  Top Layer w10: C4B.2 5152,3897.42 R1B.2 5304,3896 5342,3858 5342,3751 5402,3691 J2.57
CH4: C8B.2 J2.56 R4B.2 | length 398
  Top Layer w10: C8B.2 R4B.2 5178.42,3641 J2.56
CH5: C4C.2 J2.55 R1C.2 | length 481.3
  Top Layer w10: R1C.2 C4C.2 5200,3541 5250,3591 J2.55
CH6: C8C.2 J2.54 R4C.2 | length 532.1
  Top Layer w10: R4C.2 C8C.2 5164,3311 5263,3410 5263,3489 5315,3541 J2.54
CH7: C4D.2 J2.53 R1D.2 | length 764.8
  Top Layer w10: R1D.2 5142,3089.58 C4D.2 5194,3091 5297,3194 5297,3421 5367,3491 J2.53
CH8: C8D.2 J2.52 R4D.2 | length 884.7
  Top Layer w10: R4D.2 5143.42,2859.58 C8D.2 5254,2861 5339,2946 5339,3376 5404,3441 J2.52
CH9: C4E.2 J2.51 R1E.2 | length 1043.9
  Top Layer w10: R1E.2 C4E.2 5361,2863.58 5361,3324 5428,3391 J2.51
CH10: J2.50
CH11: J2.49
CH12: J2.48
CH13: J2.47
CH14: J2.46
CH15: J2.45
CH16: J2.44
CH17: J2.43
CH18: J2.42
CH19: J2.41
CH20: J2.40
CH21: J2.39
CH22: J2.38
CH23: J2.37
CH24: J2.36
CH25: J2.35
CH25-: J2.10
CH26: J2.1
CH26-: J2.11
CH27: J2.2
CH27-: J2.12
CH28: J2.3
CH28-: J2.13
CH29: J2.4
CH29-: J2.14
CH30: J2.5
CH30-: J2.15
CH31: J2.6
CH31-: J2.16
CH32: J2.7
CH32-: J2.17
I2C.SCL: J2.33
I2C.SDA: J2.67
NetC2A_2: C2A.2 R2A.2 U2A.3 | length 2230.4
  Top Layer w10: R2A.2 C2A.2 3128,4631.83 v1(3128,4749) ; U2A.3 4997,4460 v1(4999,4462)
  Bottom Layer w10: v1(3128,4749) 3133,4754 4707,4754 v1(4999,4462)
NetC2B_2: C2B.2 R2B.2 U2B.3 | length 2380.8
  Top Layer w10: R2B.2 C2B.2 3122.58,3500.42 v1(3122,3501) ; U2B.3 v1(4992,3995)
  Bottom Layer w10: v1(3122,3501) 3122,3534 3251,3663 3251,3856 3390,3995 v1(4992,3995)
NetC2C_2: C2C.2 R2C.2 U2C.3 | length 2591
  Top Layer w10: R2C.2 C2C.2 3726.17,4687.17 3758,4719 4150,4719 v1(4155,4724) ; U2C.3 v1(4996,3558)
  Signal Layer 1 w10: v1(4155,4724) 4153.5,4722.5 4153.5,3580.5 v1(4173,3561)
  Bottom Layer w10: v1(4173,3561) 4176,3558 v1(4996,3558)
NetC2D_2: C2D.2 R2D.2 U2D.3 | length 1551.9
  Top Layer w10: R2D.2 C2D.2 3722,3423 v1(3722,3326) ; v1(4990,3113) 4990.15,3112.85 U2D.3
  Bottom Layer w10: v1(3722,3326) 3762,3286 4422,3286 4595,3113 v1(4990,3113)
NetC2E_2: C2E.2 R2E.2 U2E.3 | length 2938.4
  Top Layer w10: R2E.2 4256.83,4625 C2E.2 ; U2E.3 4991,2676 v1(4992,2677)
  Signal Layer 1 w10: v1(4185,2680) 4185,3327 4232,3374 4232,4091 4195,4128 4195,4507 4289,4601 v1(4289,4624)
  Bottom Layer w10: v1(4185,2680) 4188,2677 v1(4992,2677)
NetC6A_2: C6A.2 R5A.2 U3A.3 | length 2126.2
  Top Layer w10: R5A.2 C6A.2 3121,4033.42 v1(3121,4123) ; U3A.3 4996.57,4235.57 v1(4997,4236)
  Bottom Layer w10: v1(3121,4123) 3200,4202 4561,4202 4595,4236 v1(4997,4236)
NetC6B_2: C6B.2 R5B.2 U3B.3 | length 2596.1
  Top Layer w10: R5B.2 C6B.2 3124,2831.42 v1(3124,2891) ; v1(4991,3775) 4993,3773 U3B.3
  Bottom Layer w10: v1(3124,2891) 3209,2976 3209,3318 3384,3493 3685,3493 3967,3775 v1(4991,3775)
NetC6C_2: C6C.2 R5C.2 U3C.3 | length 2165
  Top Layer w10: R5C.2 C6C.2 3722.58,4083.58 3744,4105 v1(3800,4105) ; U3C.3 v1(4992,3335)
  Signal Layer 1 w10: v1(3800,4105) 3867,4038 v1(3867,3339)
  Bottom Layer w10: v1(3867,3339) 3871,3335 v1(4992,3335)
NetC6D_2: C6D.2 R5D.2 U3D.3 | length 1454.8
  Top Layer w10: R5D.2 C6D.2 3725,2827.42 v1(3725,2905) ; U3D.3 4994,2876 v1(4996,2878)
  Bottom Layer w10: v1(3725,2905) 3747,2905 3774,2878 v1(4996,2878)
NetC6E_2: C6E.2 R5E.2 U3E.3 | length 1780.6
  Top Layer w10: R5E.2 C6E.2 4322.58,3489.58 v1(4323,3490) ; v1(4992,2479) 4995,2476 U3E.3
  Signal Layer 1 w10: v1(4323,3490) 4384,3490 4437,3437 v1(4437,2595)
  Bottom Layer w10: v1(4437,2595) 4498,2595 4561,2532 4939,2532 v1(4992,2479)
NetJ2_SH: J2.SH | length 2715.3
  Bottom Layer w15: J2.SH@5567,2276 5738,2276 5881,2419 5881,4370 5695,4556 J2.SH@5567,4556
NetJ12_2: J12.2
NetR1A_1: R1A.1 U2A.1 U2A.4 | length 231.5
  Top Layer w10: U2A.4 4902.6,4418.4 4902.6,4401.17 4960.17,4343.6 U2A.1 5066.76,4343.6 R1A.1
NetR1B_1: R1B.1 U2B.1 U2B.4 | length 227.1
  Top Layer w10: U2B.4 4888.85,3961.92 4959.57,3891.2 U2B.1 5075.78,3891.2 R1B.1
NetR1C_1: R1C.1 U2C.1 U2C.4 | length 219.9
  Top Layer w10: U2C.4 4892.85,3523.92 4960.17,3456.6 U2C.1 5071.18,3456.6 R1C.1
NetR1D_1: R1D.1 U2D.1 U2D.4 | length 214.3
  Top Layer w10: U2D.4 4887,3083.77 4959.77,3011 U2D.1 R1D.1
NetR1E_1: R1E.1 U2E.1 U2E.4 | length 217.2
  Top Layer w10: U2E.4 4887.85,2635.92 4957.17,2566.6 U2E.1 5069.98,2566.6 R1E.1
NetR4A_1: R4A.1 U3A.1 U3A.4 | length 218.2
  Top Layer w10: U3A.4 4968.22,4121 U3A.1 R4A.1
NetR4B_1: R4B.1 U3B.1 U3B.4 | length 222.1
  Top Layer w10: U3B.4 4889.85,3735.92 4957.17,3668.6 U3B.1 5073.18,3668.6 R4B.1
NetR4C_1: R4C.1 U3C.1 U3C.4 | length 221.9
  Top Layer w10: U3C.4 4898.6,3302.4 4898.6,3289.17 4960.17,3227.6 U3C.1 5067.18,3227.6 R4C.1
NetR4D_1: R4D.1 U3D.1 U3D.4 | length 213.9
  Top Layer w10: U3D.4 4890.85,2849.92 4961.17,2779.6 U3D.1 5069.18,2779.6 R4D.1
NetR4E_1: R4E.1 U3E.1 U3E.4 | length 217.3
  Top Layer w10: U3E.4 4891.85,2402.38 4954.63,2339.6 U3E.1 5069.18,2339.6 R4E.1
REF: C8E.2 J2.23 R4E.2 | length 2104.9
  Top Layer w10: R4E.2 C8E.2 5734,2421 5825,2512 5825,3658 5792,3691 J2.23
SHIELD: J2.30 J2.64 | length 150
  Bottom Layer w15: J2.64 J2.30
SRB2: J2.19
pads on no net: U1A.3 U1A.4 U1A.5 U1A.6 U1B.3 U1B.4 U1B.5 U1B.6 U1C.3 U1C.4 U1C.5 U1C.6 U1D.3 U1D.4 U1D.5 U1D.6 U1E.3 U1E.4 U1E.5 U1E.6
copper on no net: | length 1179.3
  Top Layer w8: 5605.01,4774 ccw(c5558,4774) 5605.01,4774
  Top Layer w10: 5801,2026 5785,2010 ; 5816,2045 5783,2045 ; 5816.5,2045.5 5853.5,2008.5 ; 5817,2010 5785,2010 ; 5818,2047 5818,2079 5783,2079 5783,2045 ; 5818.5,2079.5 5889,2009 ; 5819,2008 5819,1975 ; 5836,1992 5819,1975 ; 5837,2062 5854.5,2079.5 ; 5853.5,1974.5 5783,2045 ; 5871,2027 5888.5,2044.5 ; 5887,1975 5854,1975 5854,2009 5889,2009 ; 5887,2079 5855,2079 5855,2044 5889,2044 5889,2077 ; 5889,1977 5889,2009 ; 5785,2010 5785,1975 5819,1975

## Polygon pours and split planes (outlines as drawn)
AGND on Top Layer "TOP GND" (solid, remove dead copper, pour order 0): 2603,2072 2717,1958 6140,1958 6246,2064 6246,4718 6099,4865 2686,4865 2599,4778
AGND on Signal Layer 1 "SL1 GND" (solid, remove dead copper, pour order 2): 2718,1957 6139,1957 6246,2064 6246,4693 6073,4866 2686,4866 2599,4779 2599,2071 2609,2061
AGND on Bottom Layer "BOT GND" (solid, remove dead copper, pour order 4): 2718,1957 6138,1957 6246,2065 6246,4693 6073,4866 2686,4866 2599,4779 2599,2071
AGND on GND Plane (split plane): 6249.9,4760.68 6249.9,2064.32 6144.68,1959.1 2716.32,1959.1 2609.1,2066.32 2609.1,4782.68 2696.32,4869.9 6140.68,4869.9

## Other copper
Top Layer:
  text "H" at 5531,4762 h40
  text "E" at 5557,4742 h40

## Silkscreen, mask and mechanical layers (free items; w line width, h text height)
Top Overlay:
  text "A.E. Breakout Board" at 6026,4450 h300 r270
  text "Rev" at 5886,4448 h150 r270
  text ".PRJREV" at 5885,4227 h150 r270
Top Solder:
  circle w8: c5558,4774 r47.01
  lines w10: 5801,2026 5785,2010 ; 5816,2045 5783,2045 ; 5816.5,2045.5 5853.5,2008.5 ; 5817,2010 5785,2010 ; 5818,2047 5818,2079 5783,2079 5783,2045 ; 5818.5,2079.5 5889,2009 ; 5819,2008 5819,1975 ; 5836,1992 5819,1975 ; 5837,2062 5854.5,2079.5 ; 5853.5,1974.5 5783,2045 ; 5871,2027 5888.5,2044.5 ; 5887,1975 5854,1975 5854,2009 5889,2009 ; 5887,2079 5855,2079 5855,2044 5889,2044 5889,2077 ; 5889,1977 5889,2009 ; 5785,2010 5785,1975 5819,1975
  text "H" at 5531,4762 h40
  text "E" at 5557,4742 h40
Board Outline:
  lines w10: 2589,2058 2708,1939 4540,1939 6153,1939 6270,2056 6270,4769 6149,4890 5742,4890 2688,4890 2589,4791 2589,2090 2589,2058
Dims:
  lines w1: -319,119 3681,119
  lines w5: 33,-22 33,175 ; 2563,1939 2718,1939
Import:
  circle w0.5: c5025.28,2095.72 r60
  circle w0.5: c5025.28,4733.52 r60
  circle w0.5: c6108.94,4733.52 r60
  circle w0.5: c6108.94,2095.72 r60
  circle w0.5: c4459.33,3473.68 r22.5
  circle w0.5: c5605,2591 r17.5
  circle w0.5: c5680,2641 r17.5
  circle w0.5: c5605,2691 r17.5
  circle w0.5: c5680,2741 r17.5
  circle w0.5: c5605,2791 r17.5
  circle w0.5: c5680,2841 r17.5
  circle w0.5: c5605,2891 r17.5
  circle w0.5: c5680,2941 r17.5
  circle w0.5: c5605,2991 r17.5
  circle w0.5: c5680,3041 r17.5
  circle w0.5: c5605,3091 r17.5
  circle w0.5: c5680,3141 r17.5
  circle w0.5: c5605,3191 r17.5
  circle w0.5: c5680,3241 r17.5
  circle w0.5: c5605,3291 r17.5
  circle w0.5: c5680,3341 r17.5
  circle w0.5: c5605,3391 r17.5
  circle w0.5: c5680,3441 r17.5
  circle w0.5: c5605,3491 r17.5
  circle w0.5: c5680,3541 r17.5
  circle w0.5: c5605,3591 r17.5
  circle w0.5: c5680,3641 r17.5
  circle w0.5: c5605,3691 r17.5
  circle w0.5: c5680,3741 r17.5
  circle w0.5: c5605,3791 r17.5
  circle w0.5: c5680,3841 r17.5
  circle w0.5: c5605,3891 r17.5
  circle w0.5: c5680,3941 r17.5
  circle w0.5: c5605,3991 r17.5
  circle w0.5: c5680,4041 r17.5
  circle w0.5: c5605,4091 r17.5
  circle w0.5: c5680,4141 r17.5
  circle w0.5: c5605,4191 r17.5
  circle w0.5: c5680,4241 r17.5
  circle w0.5: c5455,2591 r17.5
  circle w0.5: c5530,2641 r17.5
  circle w0.5: c5455,2691 r17.5
  circle w0.5: c5530,2741 r17.5
  circle w0.5: c5455,2791 r17.5
  circle w0.5: c5530,2841 r17.5
  circle w0.5: c5455,2891 r17.5
  circle w0.5: c5530,2941 r17.5
  circle w0.5: c5455,2991 r17.5
  circle w0.5: c5530,3041 r17.5
  circle w0.5: c5455,3091 r17.5
  circle w0.5: c5530,3141 r17.5
  circle w0.5: c5455,3191 r17.5
  circle w0.5: c5530,3241 r17.5
  circle w0.5: c5455,3291 r17.5
  circle w0.5: c5530,3341 r17.5
  circle w0.5: c5455,3391 r17.5
  circle w0.5: c5530,3441 r17.5
  circle w0.5: c5455,3491 r17.5
  circle w0.5: c5530,3541 r17.5
  circle w0.5: c5455,3591 r17.5
  circle w0.5: c5530,3641 r17.5
  circle w0.5: c5455,3691 r17.5
  circle w0.5: c5530,3741 r17.5
  circle w0.5: c5455,3791 r17.5
  circle w0.5: c5530,3841 r17.5
  circle w0.5: c5455,3891 r17.5
  circle w0.5: c5530,3941 r17.5
  circle w0.5: c5455,3991 r17.5
  circle w0.5: c5530,4041 r17.5
  circle w0.5: c5455,4091 r17.5
  circle w0.5: c5530,4141 r17.5
  circle w0.5: c5455,4191 r17.5
  circle w0.5: c5530,4241 r17.5
  circle w0.5: c5567,4558 r62.5
  circle w0.5: c5567,2276 r62.5
  lines w0.5: 4540.1,1939.24 6153.24,1939.24 6270.35,2056.35 6270.35,4768.95 6147.06,4892.24 4777.1,4892.24
Notes:
  drawing of 67 lines, arcs and shapes, not listed
  text "1" at 906,5826.5 h70
  text "2" at 3766,5826.5 h70
  text "3" at 6646,5826.5 h70
  text "4" at 9516,5826.5 h70
  text "ELECTRONIC REVISION HISTORY ON FILE" at 7724,5591.5 h68.46
  text "DESCRIPTION" at 8694,5401.5 h39.37
  text "REV" at 7114,5371.5 h65
  text "A" at -446,4920.5 h70
  text "A" at 10854,4920.5 h70
  text "B" at 2714,3906.5 h70
  text "B" at 10854,3028.5 h70
  text "C" at 2714,1996.5 h70
  text "C" at 10854,1118.5 h70
  text "FABRICATION NOTES / 1.  PCB SUBSTRATE MATERIAL:  FR4\" (-1975.999mil,17850mil) on Notes / 2.  FINISHED THICKNESS SHALL BE 62 MIL\" (-1975.999mil,17650mil) on Notes / 3.  HOLE DIMENSIONS TO APPLY AFTER PLATING\" (-1975.999mil,17450mil) on Notes / 4.  COPPER WEIGHT: 1 OZ\" (-1975.999mil,17250mil) on Notes / 5.  SILKSCREEN COLOR: WHITE\" (-1975.999mil,17050mil) on Notes / 6.  SOLDER MASK: BLACK\" (-1975.999mil,16850mil) on Notes" at 7002,978 h78.74
  text "DRAWN:" at 5593.92,86.49 h48.89
  text "HOLE TOLERANCES" at 3131.66,51.78 h59.06
  text "THIRD ANGLE PROJECTION" at 3981.25,43.91 h59.63
  text "Haman/Seto" at 6496.28,-0.2 h71.55
  text "'.DRAWN BY'" at 5600.68,-21.64 h71.55
  text "ON ALL HOLE DIAMETERS" at 2918.18,-93.51 h59.06
  text "CHECKED:" at 5587.16,-129.76 h48.89
  text "'.Print_Date'" at 6482.51,-206.9 h71.55
  text "'.CHECKED BY'" at 5622.58,-239.61 h64.39
  text "100 Mayfield Ave / Mountain View, CA 94043" at 8279,-245 h78.74
  text "APPROVED:" at 5587.16,-346.01 h48.89
  text "DRAWING TITLE:" at 7162.39,-381.36 h59.63
  text "'.Print_Date'" at 6493.51,-423.9 h71.55
  text "'.APPROVED BY'" at 5592.58,-436.61 h64.39
  text "PCB, A.E BREAKOUT, REV 3.1, AMBER" at 7860.18,-565.87 h90.63
  text "DIMENSIONAL TOLERANCES:" at 4102,-655 h71.55
  text "D" at -446,-771.5 h70
  text "D" at 10854,-771.5 h70
  text "Luchador" at 7858.83,-782.77 h90.63
  text "DRAWING NUMBER:" at 7681.38,-971.98 h59.63
  text "SIZE:" at 7179.89,-974.75 h59.63
  text "REV:" at 10049,-990 h59.63
  text "A4" at 7332.68,-1180.12 h135.14
  text "'.PCBPN'" at 8211.58,-1191.61 h135.14
  text "01" at 9957,-1205 h135.14
  text "SCALE:" at 7169.15,-1367.98 h59.63
  text "CAGE CODE:" at 8020.61,-1367.98 h60.82
  text "SYSTEM:" at 8892.09,-1372.98 h60.82
  text "SHEET:" at 9925.64,-1372.7 h59.63
  text "OF" at 10430.45,-1372.98 h59.63
  text "NONE" at 7554.33,-1381.5 h89.44
  text "1" at 10292.35,-1387.6 h89.44
  text "1" at 10620.31,-1387.6 h89.44
  text "ALTIUM" at 9338.1,-1393.25 h89.44
  text "UNLESS OTHERWISE SPECIFIED / DIMENSIONS IN MIL (MM) / AND PER ASME Y 14.5M / PTH SIZE 8(0.2) OR LESS:  +3/-8 (+0.07/-0.2) / ALL OTHER HOLES:  ± 5 (0.12)" at 4033,-1405 h98.43
  text "2" at 3766,-1573.5 h70
  text "3" at 6646,-1573.5 h70
  text "4" at 9516,-1573.5 h70
  text "1" at 1477,-2634.5 h70